# Altium PCB Tigershark 3D R1.3.PcbDoc (part 3 of 3)
Units mil, origin at the board's own origin, x right, y up, seen from the top; angles counter-clockwise.
Board outline 5500 x 4400 mil, 4 copper layers (Top Layer, Groun Plane, Power Plane, Bottom Layer); 258 components, 243 nets, 976 pads, 863 vias.
Unrouted connection lines stored in the file: 46.
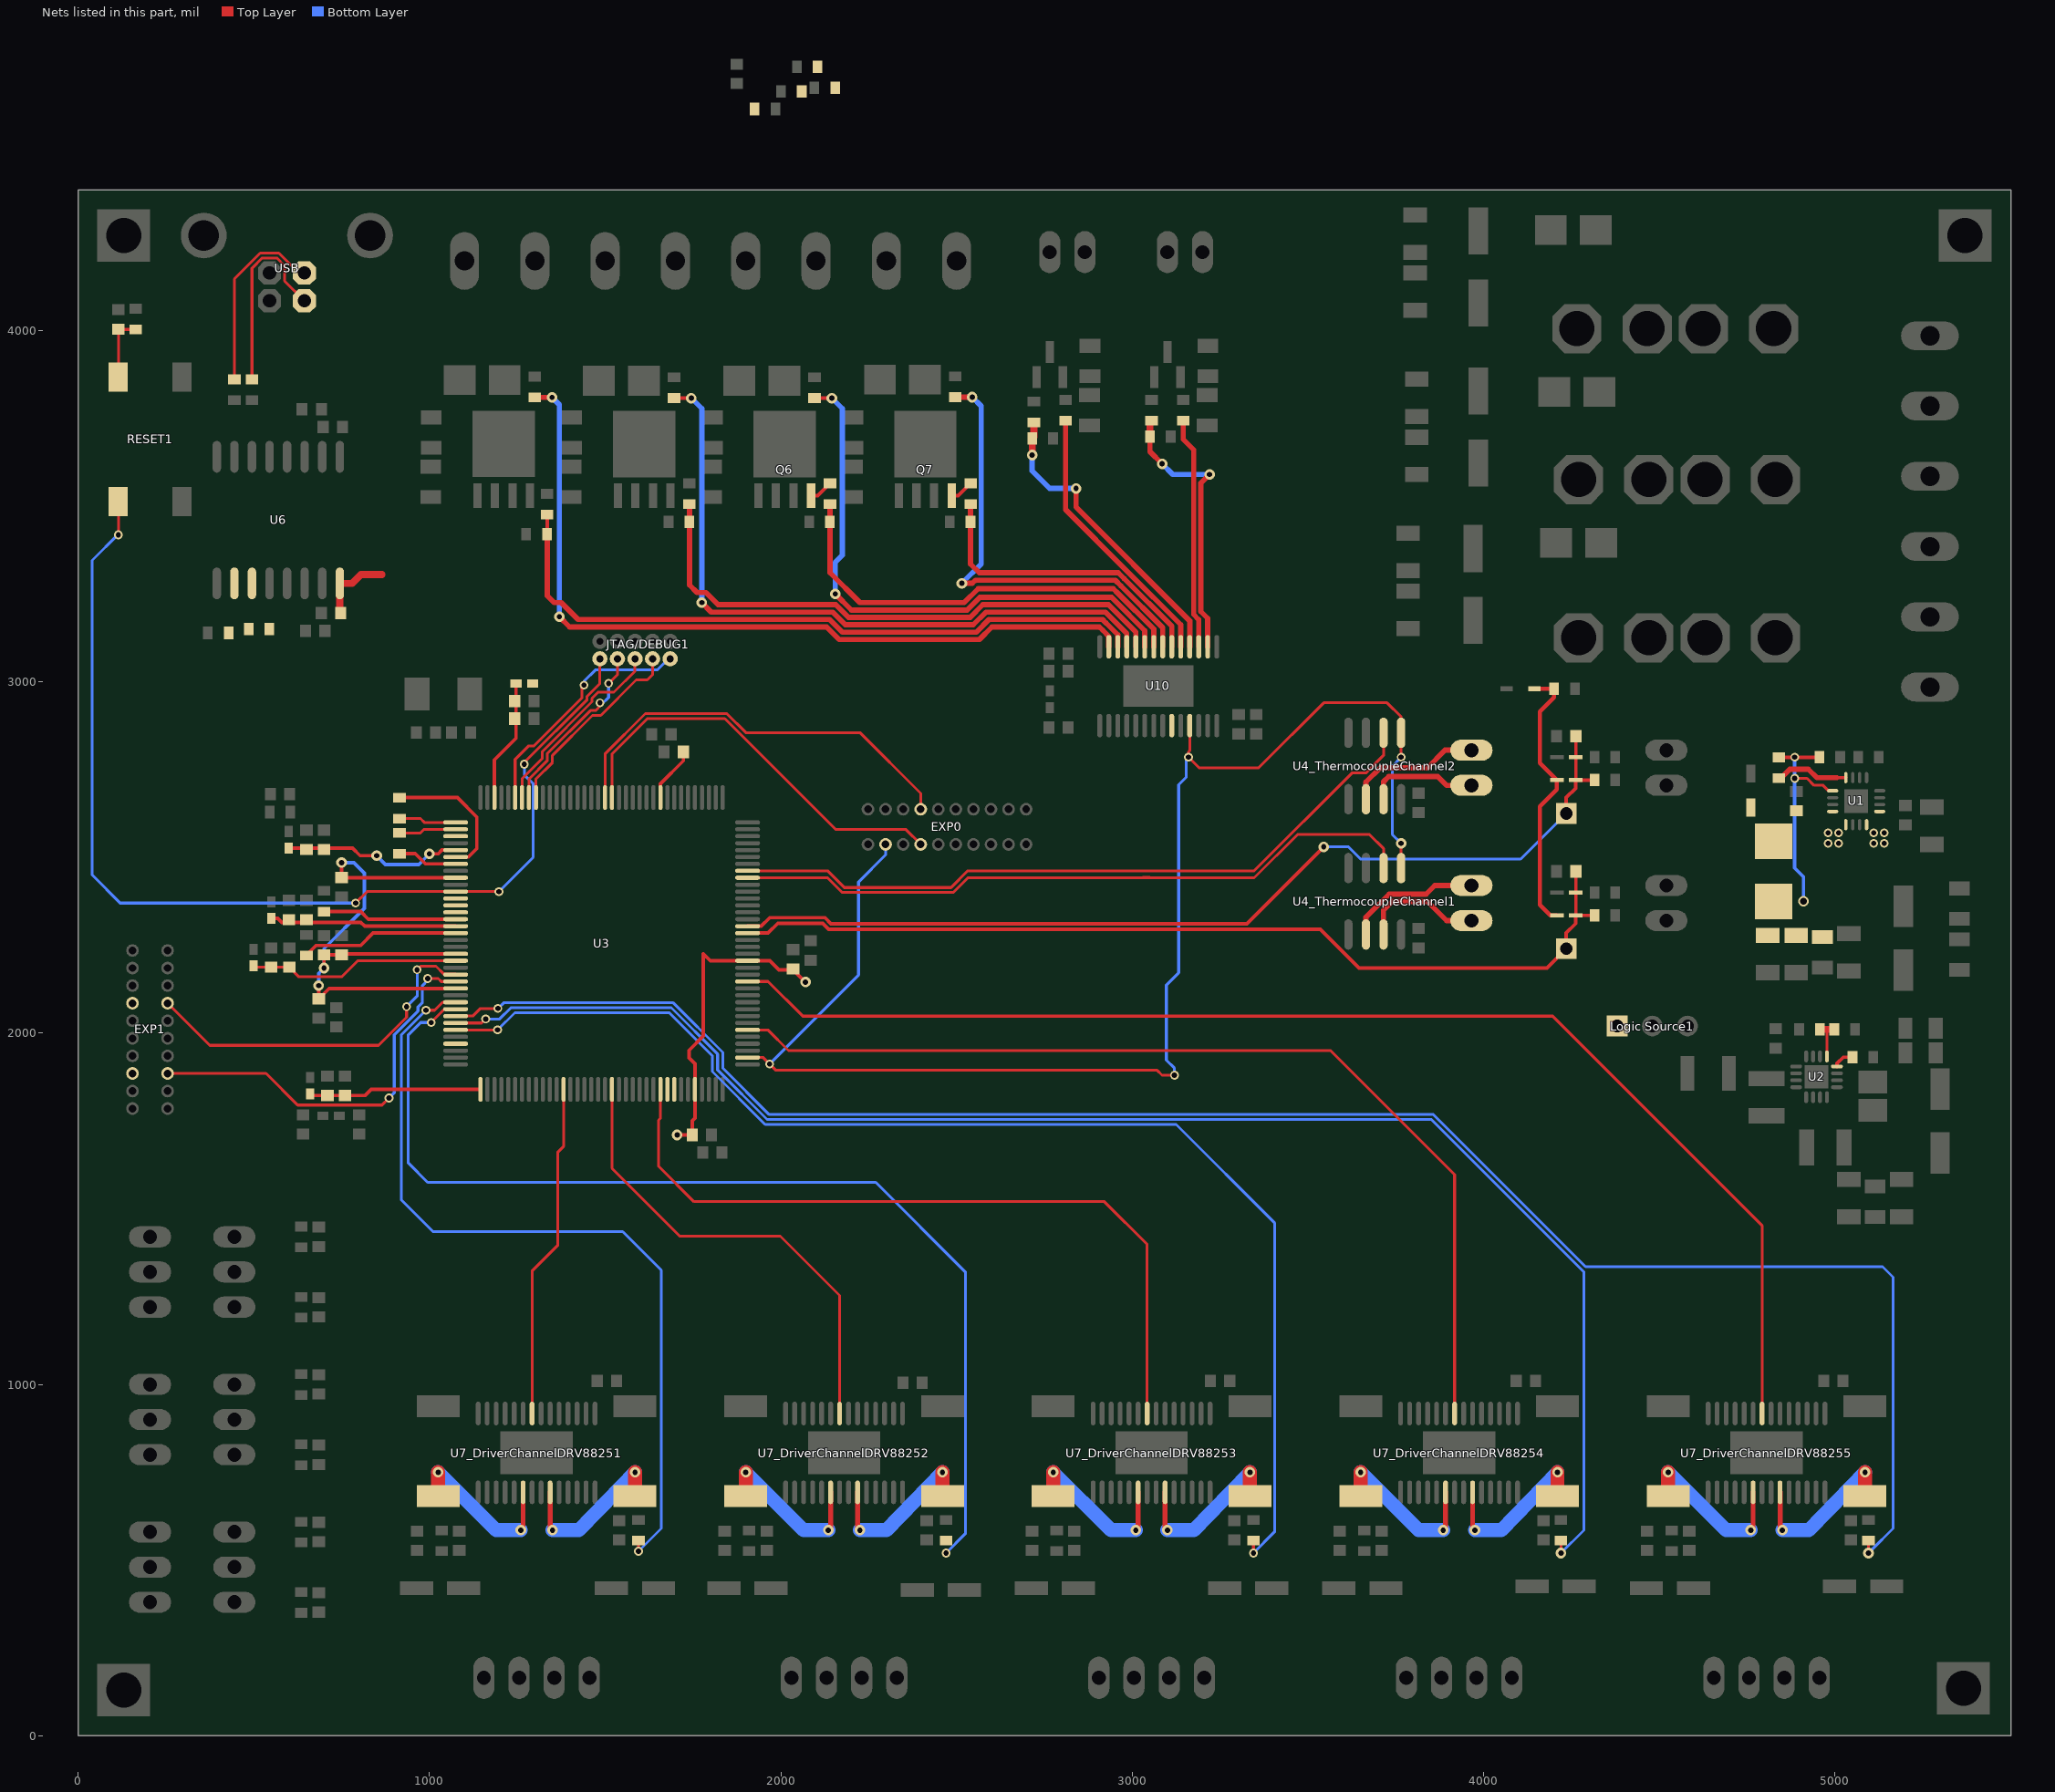
[diagram p5: the nets of this part, all layers, seen from the top]

## Via types
v1: diameter 25, hole 15, Top Layer to Bottom Layer, 408 vias
v2: diameter 30, hole 15, Top Layer to Bottom Layer, 347 vias
v3: diameter 19.68, hole 7.87, Top Layer to Bottom Layer, 90 vias
v4: diameter 50, hole 20, Top Layer to Bottom Layer, 15 vias
v5: diameter 30, hole 20, Top Layer to Bottom Layer, 3 vias

## Nets (pads, with @x,y where several pads share a name; then routed paths per layer and width w, separated by ;. In a path a pad name is that pad's centre, name@x,y a point inside that pad or via, vN(x,y) a via of type N, cw(c..) or ccw(c..) an arc to the next point about the centre after c; other vN are vias at no path point) (continued)
NetQ6_4: Q6.4 R66.2 | length 68.6
  Top Layer w10: Q6.4@2086,3529.28 2104.75,3529.28 R66.2@2140,3564.53
NetQ7_4: Q7.4 R70.2 | length 68.6
  Top Layer w10: Q7.4@2486,3529.28 2504.75,3529.28 R70.2@2540,3564.53
NetR4_1: R4.1 U3.51 | length 383.6
  Top Layer w10: R4.1@700,2345.47 804.53,2345.47 826.1,2323.9 U3.51@1074.65,2323.9
NetR5_2: R5.2 U3.42 | length 403.1
  Top Layer w10: R5.2@915,2670 1080,2670 1135,2615 1135,2525 1111.06,2501.06 U3.42@1074.65,2501.06
NetR6_1: R6.1 U3.53 | length 451.8
  Top Layer w10: R6.1@650,2220.47 650,2221.46 677.73,2249.19 804.19,2249.19 839.53,2284.53 U3.53@1074.65,2284.53
NetR12_1: R12.1 U2.4 | length 60.4
  Top Layer w10: U2.4@5005.25,1904.98 5005.25,1913.52 5023.18,1931.45 R12.1@5049.65,1931.45
NetR14_1: R14.1 U10.3 | length 661.9
  Top Layer w14: R14.1@3145,3743.05 3145,3690 3174.5,3660.5 3174.5,3191.51 3189.13,3176.87 U10.3@3189.13,3099.41
NetR15_1: R15.1 R16.1
NetR18_2: R18.2 USB.2 | length 553.5
  Top Layer w8: R18.2@495,3860.53 495,4176.64 524.36,4206 565.64,4206 588,4183.64 588,4140.21 USB.2@644.21,4084
NetR20_2: R20.2 USB.3 | length 539.2
  Top Layer w8: R20.2@445,3860.53 445,4146.44 518.56,4220 571.44,4220 628.44,4163 USB.3@644.21,4163
NetR22_2: R22.2 U3.43 | length 171.7
  Top Layer w10: R22.2@915,2510.47 959.53,2510.47 988.62,2481.38 U3.43@1074.65,2481.38
NetR32_DriverChannelDRV88251_2: R32_DriverChannelDRV88251.2 U7_DriverChannelDRV88251.9 | length 483.3
  Top Layer w14: U7_DriverChannelDRV88251.9@1343.39,692.8 1343.39,591.61 v2(1350,585)
  Top Layer w40: R32_DriverChannelDRV88251.2@1585,682.05 v2(1585,750)
  Bottom Layer w40: v2(1350,585) 1425,585 v2(1585,750)
NetR32_DriverChannelDRV88252_2: R32_DriverChannelDRV88252.2 U7_DriverChannelDRV88252.9 | length 483.3
  Top Layer w14: U7_DriverChannelDRV88252.9@2218.39,692.8 2218.39,591.61 v2(2225,585)
  Top Layer w40: R32_DriverChannelDRV88252.2@2460,682.05 v2(2460,750)
  Bottom Layer w40: v2(2225,585) 2300,585 v2(2460,750)
NetR32_DriverChannelDRV88253_2: R32_DriverChannelDRV88253.2 U7_DriverChannelDRV88253.9 | length 483.3
  Top Layer w14: U7_DriverChannelDRV88253.9@3093.39,692.8 3093.39,591.61 v2(3100,585)
  Top Layer w40: R32_DriverChannelDRV88253.2@3335,682.05 v2(3335,750)
  Bottom Layer w40: v2(3100,585) 3175,585 v2(3335,750)
NetR32_DriverChannelDRV88254_2: R32_DriverChannelDRV88254.2 U7_DriverChannelDRV88254.9 | length 483.3
  Top Layer w14: U7_DriverChannelDRV88254.9@3968.39,692.8 3968.39,591.61 v2(3975,585)
  Top Layer w40: R32_DriverChannelDRV88254.2@4210,682.05 v2(4210,750)
  Bottom Layer w40: v2(3975,585) 4050,585 v2(4210,750)
NetR32_DriverChannelDRV88255_2: R32_DriverChannelDRV88255.2 U7_DriverChannelDRV88255.9 | length 483.3
  Top Layer w14: U7_DriverChannelDRV88255.9@4843.39,692.8 4843.39,591.61 v2(4850,585)
  Top Layer w40: R32_DriverChannelDRV88255.2@5085,682.05 v2(5085,750)
  Bottom Layer w40: v2(4850,585) 4925,585 v2(5085,750)
NetR33_DriverChannelDRV88251_2: R33_DriverChannelDRV88251.2 U7_DriverChannelDRV88251.6 | length 481.8
  Top Layer w14: v2(1260,585) 1266.61,591.61 U7_DriverChannelDRV88251.6@1266.61,692.8
  Top Layer w40: R33_DriverChannelDRV88251.2@1025,682.05 v2(1025,750)
  Bottom Layer w40: v2(1025,750) 1190,585 v2(1260,585)
NetR33_DriverChannelDRV88252_2: R33_DriverChannelDRV88252.2 U7_DriverChannelDRV88252.6 | length 481.8
  Top Layer w14: v2(2135,585) 2141.61,591.61 U7_DriverChannelDRV88252.6@2141.61,692.8
  Top Layer w40: R33_DriverChannelDRV88252.2@1900,682.05 v2(1900,750)
  Bottom Layer w40: v2(1900,750) 2065,585 v2(2135,585)
NetR33_DriverChannelDRV88253_2: R33_DriverChannelDRV88253.2 U7_DriverChannelDRV88253.6 | length 481.8
  Top Layer w14: v2(3010,585) 3016.61,591.61 U7_DriverChannelDRV88253.6@3016.61,692.8
  Top Layer w40: R33_DriverChannelDRV88253.2@2775,682.05 v2(2775,750)
  Bottom Layer w40: v2(2775,750) 2940,585 v2(3010,585)
NetR33_DriverChannelDRV88254_2: R33_DriverChannelDRV88254.2 U7_DriverChannelDRV88254.6 | length 481.8
  Top Layer w14: v2(3885,585) 3891.61,591.61 U7_DriverChannelDRV88254.6@3891.61,692.8
  Top Layer w40: R33_DriverChannelDRV88254.2@3650,682.05 v2(3650,750)
  Bottom Layer w40: v2(3650,750) 3815,585 v2(3885,585)
NetR33_DriverChannelDRV88255_2: R33_DriverChannelDRV88255.2 U7_DriverChannelDRV88255.6 | length 481.8
  Top Layer w14: v2(4760,585) 4766.61,591.61 U7_DriverChannelDRV88255.6@4766.61,692.8
  Top Layer w40: R33_DriverChannelDRV88255.2@4525,682.05 v2(4525,750)
  Bottom Layer w40: v2(4525,750) 4690,585 v2(4760,585)
NetR37_1: R37.1 R38.2 U2.5 | length 117.4
  Top Layer w8: U2.5@4976.71,1933.52 4976.71,2009.98
  Top Layer w20: R38.2@4956.71,2010.45 R37.1@4997.65,2010.45
NetR45_1: R45.1 R46.1 U10.2 | length 795.8
  Top Layer w8: R45.1@3050.47,3738.52 R45.1@3055,3743.05
  Top Layer w15: R46.1@3050.47,3697.58 3050.47,3654.53 v2(3085,3620) ; U10.2@3214.72,3099.41 3214.72,3180.28 3195,3200 3195,3565 v2(3220,3590)
  Top Layer w20: R46.1@3050.47,3697.58 R45.1@3050.47,3738.52
  Bottom Layer w15: v2(3085,3620) 3115,3590 v2(3220,3590)
NetR48_1: R48.1 U10.5 | length 779.5
  Top Layer w15: R48.1@2810,3743.05 2810,3490 2985.63,3314.37 3137.95,3162.09 U10.5@3137.95,3099.41
NetR52_1: R52.1 R55.1 U10.4 | length 870.4
  Top Layer w8: R55.1@2715.47,3692.58 R55.1@2720,3697.1
  Top Layer w15: v2(2840,3550) 2840,3497.02 3163.54,3173.47 U10.4@3163.54,3099.41
  Top Layer w20: v2(2715,3645) 2715.47,3645.47 R55.1@2715.47,3692.58 ; R55.1@2720,3697.1 R52.1@2720,3738.05
  Bottom Layer w15: v2(2715,3645) 2715,3600 2765,3550 v2(2840,3550)
NetR57_1: R57.1 U10.13 | length 2327.8
  Top Layer w15: R57.1@1300,3809.11 v2(1349.11,3809.11) ; v2(1370,3185) 1399,3156 2130.21,3156 2166.21,3120 2565,3120 2601,3156 2906.41,3156 2916.04,3146.37 ; 2916.08,3146.37 2933.23,3129.23 U10.13@2933.23,3099.41
  Bottom Layer w15: v2(1349.11,3809.11) 1370,3788.22 v2(1370,3185)
NetR58_1: R58.1 R59.1 U10.12 | length 1964.5
  Top Layer w10: R59.1@1335,3420 R58.1@1335,3475.47
  Top Layer w15: R59.1@1335,3420 1335,3244.7 1354.7,3225 1375,3225 1423,3177 2138.9,3177 2174.9,3141 2556.3,3141 2592.3,3177 2915.11,3177 2924.74,3167.37 ; 2924.78,3167.37 2958.82,3133.34 U10.12@2958.82,3099.41
NetR61_1: R61.1 U10.11 | length 1957.1
  Top Layer w10: R61.1@1696,3807.11 v2(1745.11,3807.11)
  Top Layer w15: v2(1775,3225) 1802,3198 2147.6,3198 2183.6,3162 2547.6,3162 2583.6,3198 2923.81,3198 2933.44,3188.37 ; 2933.48,3188.37 2984.41,3137.44 U10.11@2984.41,3099.41
  Bottom Layer w15: v2(1745.11,3807.11) 1775,3777.22 v2(1775,3225)
NetR62_1: R62.1 R63.1 U10.10 | length 1627.7
  Top Layer w15: R62.1@1740,3505.47 1740,3275 1761.5,3253.5 1786.8,3253.5 1821.3,3219 2156.3,3219 2192.3,3183 2538.9,3183 2574.9,3219 2932.51,3219 2942.13,3209.37 ; 2942.18,3209.37 3010,3141.55 U10.10@3010,3099.41
NetR65_1: R65.1 U10.9 | length 1626.8
  Top Layer w10: R65.1@2096,3807.11 v2(2145.11,3807.11)
  Top Layer w15: v2(2155,3250) 2201,3204 2530.21,3204 2566.21,3240 2941.21,3240 2950.83,3230.37 ; 2950.88,3230.37 3035.59,3145.66 U10.9@3035.59,3099.41
  Bottom Layer w15: v2(2145.11,3807.11) 2175,3777.22 2175,3360 2155,3340 v2(2155,3250)
NetR66_1: R66.1 R67.1 U10.8 | length 1266.5
  Top Layer w15: R66.1@2140,3505.47 2140,3310 2225,3225 2521.51,3225 2561.51,3265 2945.9,3265 2959.53,3251.37 ; 2959.58,3251.37 3061.18,3149.77 U10.8@3061.18,3099.41
NetR69_1: R69.1 U10.7 | length 1297.7
  Top Layer w15: R69.1@2496,3809.75 v2(2544.75,3809.75) ; v2(2515,3280) 2545,3280 2554,3289 2951.6,3289 2968.23,3272.37 3086.77,3153.88 U10.7@3086.77,3099.41
  Bottom Layer w15: v2(2515,3280) 2570,3335 2570,3784.5 v2(2544.75,3809.75)
NetR70_1: R70.1 R71.1 U10.6 | length 874.7
  Top Layer w15: R70.1@2540,3505.47 2540,3335 2565,3310 2960.3,3310 2976.93,3293.37 3112.36,3157.98 U10.6@3112.36,3099.41
NetT2_ThermocoupleChannel1_1: T2_ThermocoupleChannel1.1 U4_ThermocoupleChannel1.3 | length 351.9
  Top Layer w15: U4_ThermocoupleChannel1.3@3715,2280.51 3715,2349.49 3740,2374.49 3840,2374.49 3894.49,2320 T2_ThermocoupleChannel1.1@3965,2320
NetT2_ThermocoupleChannel1_2: T2_ThermocoupleChannel1.2 U4_ThermocoupleChannel1.2 | length 386.5
  Top Layer w15: U4_ThermocoupleChannel1.2@3665,2280.51 3665,2329.49 3731,2395.49 3836,2395.49 3860.51,2420 T2_ThermocoupleChannel1.2@3965,2420
NetT2_ThermocoupleChannel2_1: T2_ThermocoupleChannel2.1 U4_ThermocoupleChannel2.3 | length 316.1
  Top Layer w15: U4_ThermocoupleChannel2.3@3715,2665.51 3715,2715 3730,2730 3869.49,2730 3894.49,2705 T2_ThermocoupleChannel2.1@3965,2705
NetT2_ThermocoupleChannel2_2: T2_ThermocoupleChannel2.2 U4_ThermocoupleChannel2.2 | length 386.5
  Top Layer w15: U4_ThermocoupleChannel2.2@3665,2665.51 3665,2714.49 3705.51,2755 3840,2755 3890,2805 T2_ThermocoupleChannel2.2@3965,2805
NetU10_23: U10.23
NRST: U3.69
OVREF: D1.2 D11_ThermistorChannel1.2 D11_ThermistorChannel2.2 R1.1 | length 788.8
  Top Layer w12: D1.2@4144.37,2980 R1.1@4200.47,2980 4200.47,2955.47 4160,2915 4160,2768.43 D11_ThermistorChannel2.2@4208.43,2720 4208.43,2693.43 4160,2645 4160,2365 4190,2335 D11_ThermistorChannel1.2@4208.43,2335
PG: R9.2 U1.8 | length 214
  Top Layer w10: 5005,2726.93 U1.8@5030.47,2726.93
  Top Layer w15: R9.2@4836.46,2726.93 4846.93,2726.93 4871,2751 4924,2751 4948.07,2726.93 5005,2726.93
REF1: R31_DriverChannelDRV88251.2 U3.63 | length 2343.3
  Top Layer w8: v1(990,2065) 1015,2065 1037.68,2087.68 U3.63@1074.65,2087.68 ; v1(1595,525) R31_DriverChannelDRV88251.2@1595,555.47
  Bottom Layer w8: v1(990,2065) 920,1995 920,1525 1010,1435 1550,1435 1660,1325 1660,590 v1(1595,525)
REF2: R31_DriverChannelDRV88252.2 U3.64 | length 3066.5
  Top Layer w8: v1(1005,2030) 1005,2030.68 1042.31,2067.99 U3.64@1074.65,2067.99
  Bottom Layer w8: v1(1005,2030) 975,2030 940,1995 940,1630 995,1575 2270,1575 2525,1320 2525,575 v1(2470,520)
REF3: R31_DriverChannelDRV88253.2 U3.67 | length 3625.2
  Top Layer w8: U3.67@1074.65,2008.94 v1(1193.94,2008.94) ; v1(3345,520) R31_DriverChannelDRV88253.2@3345,555.47
  Bottom Layer w8: v1(1193.94,2008.94) 1243,2058 1682.4,2058 1805,1935.4 1805,1890.2 1955.2,1740 3125,1740 3405,1460 3405,580 v1(3345,520)
REF4: R31_DriverChannelDRV88254.2 U3.66 | length 4428.7
  Top Layer w8: U3.66@1074.65,2028.62 1148.62,2028.62 v1(1160,2040) ; v2(4220,520) R31_DriverChannelDRV88254.2@4220,555.47
  Bottom Layer w8: v1(1160,2040) 1200,2040 1232,2072 1688.2,2072 1820,1940.2 1820,1895 1961,1754 3851,1754 4285,1320 4285,585 v2(4220,520)
REF5: R31_DriverChannelDRV88255.2 U3.65 | length 5291.2
  Top Layer w8: U3.65@1074.65,2048.31 1123.31,2048.31 1145,2070 v1(1195,2070) ; v2(5095,520) R31_DriverChannelDRV88255.2@5095,555.47
  Bottom Layer w8: v1(1195,2070) 1211,2086 1694,2086 1835,1945 1835,1900 1967,1768 3857,1768 4290,1335 5135,1335 5165,1305 5165,590 v2@5105,530
REF_EXP1: EXP1.8 U3.100
REF_EXP2: EXP1.13 U3.60 U3.101 | length 1144.2
  Top Layer w8: EXP1.13@255,1885 535,1885 625,1795 865,1795 v1(885,1815) ; v1(995,2155) 1025,2155 1033.27,2146.73 U3.60@1074.65,2146.73
  Bottom Layer w8: v1(885,1815) 900,1830 900,1995 967.5,2062.5 967.5,2074.32 980,2086.82 980,2135 995,2150 v1(995,2155)
RESET: C63.2 JTAG/DEBUG1.10 R21.1 RESET1.1 U3.47 | length 3284.4
  Top Layer w8: RESET1.1@114.45,3512.83 115,3512.28 v1(115,3418) ; RESET1.1@115.97,3867.17 115.97,4002.47 R21.1@164,4002.47 ; v1(790,2370) 822.64,2402.64 U3.47@1074.65,2402.64 v1(1197.64,2402.64) ; v1@1267.5,2767.5 1448.5,2948.5 1448.5,2958.3 1485,2994.8 JTAG/DEBUG1.10@1485,3065
  Bottom Layer w8: v1@115,3420 40,3345 40,2450 120,2370 v1(790,2370) ; v1(1197.64,2402.64) 1295,2500 1295,2710 1270,2735 v1(1270,2765)
RXD1: EXP0.17 U3.18 | length 1208.8
  Top Layer w8: U3.18@1499.84,2670.35 1499.84,2794.64 1614.2,2909 1846.2,2909 1900.2,2855 2225,2855 2398,2682 EXP0.17@2398,2637
SCLK: EXP0.2 U3.110 U4_ThermocoupleChannel1.5 U4_ThermocoupleChannel2.5 U10.25 | length 4191
  Top Layer w8: U3.110@1905.35,1930.2 1949.8,1930.2 v1(1967.9,1912.1) 1986,1894 3070.8,1894 3084.8,1880 v1(3120,1880) ; U10.25@3163.54,2875 3163.54,2803.54 3160,2800 v1(3160,2785) 3190,2755 3360,2755 3545,2940 3725,2940 3765,2900 U4_ThermocoupleChannel2.5@3765,2854.49 v1(3765,2785) ; U4_ThermocoupleChannel1.5@3765,2469.49 v2(3765,2540)
  Bottom Layer w8: v1(1967.9,1912.1) 2221,2165.2 2221,2429.8 2298,2506.8 EXP0.2@2298,2537 ; v1(3120,1880) 3120,1900 3097,1923 3097,2136.6 3132,2171.6 3132,2706.6 3153.5,2728.1 3153.5,2778.5 v1(3160,2785) ; v2(3765,2540) 3740,2565 3740,2760 v1(3765,2785)
SHDN: U3.50
STEP1: U3.85 U7_DriverChannelDRV88251.22 | length 959.5
  Top Layer w8: U7_DriverChannelDRV88251.22@1292.2,917.2 1292.2,1322.81 1364.68,1395.28 1364.68,1660.28 1381.73,1677.34 U3.85@1381.73,1839.65
STEP2: U3.92 U7_DriverChannelDRV88252.22 | length 1358.4
  Top Layer w8: U3.92@1519.53,1839.65 1519.53,1614.87 1712.4,1422 1998.6,1422 2167.2,1253.4 U7_DriverChannelDRV88252.22@2167.2,917.2
STEP3: U3.99 U7_DriverChannelDRV88253.22 | length 2184.5
  Top Layer w8: U3.99@1657.32,1839.65 1657.32,1757.12 1652,1751.8 1652,1620.99 1752.99,1520 2920.6,1520 3042.2,1398.4 U7_DriverChannelDRV88253.22@3042.2,917.2
STEP4: U3.114 U7_DriverChannelDRV88254.22 | length 2862.4
  Top Layer w8: U3.114@1905.35,2008.94 1962.87,2008.94 2021.81,1950 3564.4,1950 3917.2,1597.19 U7_DriverChannelDRV88254.22@3917.2,917.2
STEP5: U3.121 U7_DriverChannelDRV88255.22 | length 3709.5
  Top Layer w8: U3.121@1905.35,2146.73 1963.67,2146.73 2062.4,2048 4196.4,2048 4792.2,1452.19 U7_DriverChannelDRV88255.22@4792.2,917.2
STEP_EXP1: EXP1.4
STEP_EXP2: EXP1.17 U3.59 | length 1033.8
  Top Layer w8: EXP1.17@255,2085 375,1965 855,1965 935,2045 v1(935,2075) ; v1(965,2180) 975,2190 1018.73,2190 1040.12,2168.6 1072.46,2168.6 U3.59@1074.65,2166.42
  Bottom Layer w8: v1(935,2075) 965,2105 v1(965,2180)
SW: C7.1 D5.2 L1.1 U1.1 U1.12 U1.13 U1.16
  other v1: 4980,2540 5010,2540 5110,2540 5140,2540 4980,2570 5010,2570 5110,2570 5140,2570
SW_OUT: C8.2 C29.1 FB2.1 L1.2 R7.2 R9.1 U1.9 | length 668.1
  Top Layer w8: v1(4885,2725) 4920,2725 4940,2705 4966.21,2705 4981.69,2689.53 U1.9@4993.07,2689.53
  Top Layer w10: R9.1@4835.47,2785 v1(4885,2785) R7.2@4960.47,2785
  Bottom Layer w10: v1(4885,2785) 4885,2470 4910,2445 v5(4910,2375)
TC_CS1: U3.136 U4_ThermocoupleChannel1.6 | length 1968.1
  Top Layer w8: U3.136@1905.35,2442.01 2132.79,2442.01 2174.8,2400 2490.2,2400 2532.2,2442.01 3030.19,2442.01 3030.68,2442.5 3049.32,2442.5 3049.81,2442.01 3347.01,2442.01 3470,2565 3675.36,2565 3715,2525.36 U4_ThermocoupleChannel1.6@3715,2469.49
TC_CS2: U3.137 U4_ThermocoupleChannel2.6 | length 2079.1
  Top Layer w8: U3.137@1905.35,2461.69 2132.9,2461.69 2180.6,2414 2484.4,2414 2532.09,2461.69 3346.69,2461.69 3625,2740 3665,2740 3715,2790 U4_ThermocoupleChannel2.6@3715,2854.49 U4_ThermocoupleChannel2.6@3715,2825
TCK/SWDCLK: JTAG/DEBUG1.4 R25.1 U3.28 | length 564.4
  Top Layer w8: U3.28@1302.99,2670.35 1302.99,2722.99 1350,2770 1350,2790 1464,2904 1487.48,2904 1588.48,3005 1620,3005 1635,3020 JTAG/DEBUG1.4@1635,3065
TDI: JTAG/DEBUG1.8 R27.1 U3.29 | length 521.7
  Top Layer w8: U3.29@1283.31,2670.35 1283.31,2723.11 1335,2774.8 1335,2794.8 1458.2,2918 1473,2918 1490,2935 v1(1485,2940) ; v1(1510,2995) 1535,3020 JTAG/DEBUG1.8@1535,3065
  Bottom Layer w8: v1(1485,2940) 1490,2935 1510,2955 v1(1510,2995)
TDO/SWO: JTAG/DEBUG1.6 R26.1 U3.30 | length 554.1
  Top Layer w8: U3.30@1263.62,2670.35 1263.62,2723.62 1321,2781 1321,2801.2 1462.5,2942.7 1462.5,2952.5 1480,2970 1525,2970 1585,3030 JTAG/DEBUG1.6@1585,3065
THERM_AN1: C30_ThermistorChannel1.2 D11_ThermistorChannel1.1 D12_ThermistorChannel1.2 R14_ThermistorChannel1.1 THM_TP1_ThermistorChannel1.1 U3.128 | length 2700.7
  Top Layer w10: U3.128@1905.35,2284.53 1963.31,2284.53 1991.24,2312.45 2118.93,2312.45 2136.38,2295 3535,2295 3645,2185 4180,2185 THM_TP1_ThermistorChannel1.1@4235,2240 4235,2285 4261.57,2311.57 D11_ThermistorChannel1.1@4261.57,2335 R14_ThermistorChannel1.1@4315.47,2335 ; D11_ThermistorChannel1.1@4262.56,2335.98 C30_ThermistorChannel1.2@4262.56,2460
THERM_AN2: C30_ThermistorChannel2.2 D11_ThermistorChannel2.1 D12_ThermistorChannel2.2 R14_ThermistorChannel2.1 THM_TP1_ThermistorChannel2.1 U3.129 | length 2789.9
  Top Layer w10: U3.129@1905.35,2304.21 1944.21,2304.21 1968.45,2328.45 2125.56,2328.45 2143.01,2311 3326,2311 v2(3545,2530) ; THM_TP1_ThermistorChannel2.1@4235,2625 4235,2670 4261.57,2696.57 D11_ThermistorChannel2.1@4261.57,2720 R14_ThermistorChannel2.1@4315.47,2720 ; D11_ThermistorChannel2.1@4262.56,2720.98 C30_ThermistorChannel2.2@4262.56,2845
  Bottom Layer w8: v2(3545,2530) 3615,2530 3650,2495 4105,2495 THM_TP1_ThermistorChannel2.1@4235,2625
TMS/SWDIO: JTAG/DEBUG1.2 R24.1 U3.31 | length 692.4
  Top Layer w8: U3.31@1243.94,2670.35 1243.94,2778.94 1282.5,2817.5 1297.5,2817.5 1434.5,2954.5 1434.5,2984.5 v1(1440,2990)
  Bottom Layer w8: v1(1440,2990) 1440,3001.46 1471.89,3033.35 1648.11,3033.35 1679.76,3065 JTAG/DEBUG1.2@1685,3065
TXD1: EXP0.4 U3.17 | length 1192.6
  Top Layer w8: U3.17@1519.53,2670.35 1519.53,2794.53 1620,2895 1840.4,2895 2155.4,2580 2355,2580 EXP0.4@2398,2537
UDM_N: R22.1 U3.38 U6.11 | length 163.9
  Top Layer w8: R22.1@915,2569.53 974.53,2569.53 984.8,2579.8 U3.38@1074.65,2579.8
UDP_P: R5.1 U3.37 U6.10 | length 164.2
  Top Layer w8: R5.1@915,2610.47 974.53,2610.47 985.51,2599.49 U3.37@1074.65,2599.49
VBUS: "Logic Source1.1" C57.2 R16.2 U3.39 U6.16 | length 212.7
  Top Layer w20: C57.2@745,3197.56 U6.16@745,3279.88 779.88,3279.88 805,3305 865,3305
VDDANA: C13.2 C27.2 FB6.2 U3.73 | length 494.3
  Top Layer w10: FB6.2@663.94,1822.44 C27.2@710,1822.44 C13.2@760,1822.44 817.44,1822.44 834.65,1839.65 U3.73@1145.51,1839.65
  Top Layer w15: FB6.2@660,1826.38 FB6.2@663.94,1822.44
VDDBU: C28.2 C53.2 FB7.2 U3.52 | length 533.8
  Top Layer w10: FB7.2@550,2326.38 568.62,2326.38 580,2315 805,2315 815.79,2304.21 U3.52@1074.65,2304.21
VDDIN: C54.2 C55.2 FB5.2 U3.57 | length 617.1
  Top Layer w8: FB5.2@501.22,2201.38 FB5.2@505.16,2197.44 ; FB5.2@503.94,2187.44 C55.2@550,2187.44 C54.2@601.22,2187.44 628.66,2160 750,2160 795.79,2205.79 U3.57@1074.65,2205.79 ; C54.2@601.22,2197.44 C54.2@608.66,2190
VDDOUT: C36.2 C37.2 C38.2 C39.2 C40.2 C41.2 C42.2 FB4.1 U3.10 U3.45 U3.56 U3.61 U3.104 U3.124 | length 2738.2
  Top Layer w10: v2(685,2135) C42.2@685,2097.56 714.49,2127.05 U3.61@1074.65,2127.05 ; v2(700,2185) C37.2@700,2222.44 C36.2@750,2222.44 753.03,2225.47 U3.56@1074.65,2225.47 ; v2(750,2485) C41.2@750,2442.56 750.55,2442.01 U3.45@1074.65,2442.01 ; U3.10@1657.32,2670.35 1657.32,2709.7 1722.56,2774.93 C38.2@1722.56,2800 ; v2(1705,1710) C40.2@1747.87,1710 1747.87,1749.8 1755.75,1757.68 U3.104@1755.75,1839.65 1755.75,1912.44 1738.96,1929.23 1738.96,1950.77 1779.53,1991.34 1779.53,2225.47 1799.21,2205.79 U3.124@1905.35,2205.79 1969.21,2205.79 ; 1970.16,2204.84 1995,2180 C39.2@2035,2180 ; C39.2@2035,2182.44 C39.2@2035,2180 ; v2(2070,2145) C39.2@2035,2180
  Bottom Layer w10: v2(685,2135) 685,2170 v2(700,2185) 700,2240 815,2355 815,2455 785,2485 v2(750,2485)
VDDPLL: C32.2 C33.2 FB4.2 U3.34 | length 350.1
  Top Layer w10: U3.34@1184.88,2670.35 1184.88,2777.51 1246.38,2839.01 FB4.2@1246.38,2995
VDDUTMI: C60.2 C61.2 FB8.2 U3.41 | length 520.7
  Top Layer w10: FB8.2@600,2526.38 781.25,2526.38 802.63,2505 v2(850,2505) ; v2(1000,2510) 1025,2510 1035.75,2520.75 U3.41@1074.65,2520.75
  Bottom Layer w10: v2@850,2515 v2(850,2505) 875,2480 970,2480 v2(1000,2510)
XIN32: U3.48
XOUT32: U3.49
pads on no net: JTAG/DEBUG1.1@1760.59,3146.5 JTAG/DEBUG1.7 U1.6 U1.7 U3.1 U3.2 U3.3 U3.4 U3.5 U3.6 U3.7 U3.8 U3.13 U3.14 U3.15 U3.16 U3.23 U3.24 U3.25 U3.26 U3.27 U3.32 U3.130 U3.143 U3.144 U4_ThermocoupleChannel1.8 U4_ThermocoupleChannel2.8 U6.13 U7_DriverChannelDRV88251.18 U7_DriverChannelDRV88251.19 U7_DriverChannelDRV88251.23 U7_DriverChannelDRV88251.27 U7_DriverChannelDRV88252.18 U7_DriverChannelDRV88252.19 U7_DriverChannelDRV88252.23 U7_DriverChannelDRV88252.27 U7_DriverChannelDRV88253.18 U7_DriverChannelDRV88253.19 U7_DriverChannelDRV88253.23 U7_DriverChannelDRV88253.27 U7_DriverChannelDRV88254.18 U7_DriverChannelDRV88254.19 U7_DriverChannelDRV88254.23 U7_DriverChannelDRV88254.27 U7_DriverChannelDRV88255.18 U7_DriverChannelDRV88255.19 U7_DriverChannelDRV88255.23 U7_DriverChannelDRV88255.27 USB.P$1 USB.P$2
copper on no net: | length 622.1
  Top Layer w15: 595,3279.88 595,3370 630,3405 865,3405
  Bottom Layer w8: 2365,880 2400,845 ; 3240,880 3275,845 ; 4115,880 4150,845 ; 4990,880 5025,845 4990,880

## Polygon pours and split planes (outlines as drawn)
GND on Top Layer "Top Layer-No Net" (solid, remove dead copper, pour order 120): 3745,3175 3745,3010 4085,3010 4085,3175 4000,3175 4000,3235 3995,3240 3940,3240 3940,3175
GND on Top Layer "Top Layer-No Net" (solid, remove dead copper, pour order 118): 3745,3615 3745,3400 3825,3400 3825,3470 4010,3470 4010,3690 3960,3690 3960,3615
GND on Top Layer "Top Layer-No Net" (solid, remove dead copper, pour order 116): 3770,4085 3770,3835 3850,3835 3850,3910 4010,3910 4010,4145 3960,4145 3960,4085
+12VCC3 on Top Layer "Top Layer-No Net" (solid, remove dead copper, pour order 87): 4545,3475 4545,3675 4255,3675 4255,3900 3855,3900 3855,3830 3760,3830 3760,3995 3480,3995 3480,3620 3950,3620 3950,3700 4020,3700 4020,3475
SW_OUT on Top Layer "Top Layer-No Net" (solid, remove dead copper, pour order 51): 4769,2250 4769,2430 4930,2430 4930,2305 4994,2305 4994,2250
NetF3_1 on Top Layer "Top Layer-No Net" (solid, remove dead copper, pour order 88): 5435,3080 5435,3245 4550,3245 4550,3025 5120,3025 5120,3080
+12VCC2 on Top Layer "Top Layer-No Net" (solid, remove dead copper, pour order 108): 3230,3070 3375,3070 3375,4375 3260,4375 3260,3225 3230,3195
GND on Top Layer "Top Layer-No Net" (solid, remove dead copper, pour order 113): 2795,3100 2795,2845 2840,2845 2840,2915 3275,2915 3280,2910 3280,2890 3380,2890 3375,2895 3375,3060 2850,3060 2850,3100
+12VCC2 on Top Layer "Top Layer-No Net" (solid, remove dead copper, pour order 110): 2910,3935 2910,4300 2825,4300 2825,3985 2850,3985 2850,3935
+12VCC2 on Top Layer "Top Layer-No Net" (solid, remove dead copper, pour order 110): 3245,3935 3245,4300 3160,4300 3160,3985 3185,3985 3185,3935
NetD10_1 on Top Layer "Top Layer-No Net" (solid, remove dead copper, pour order 105): 3080,3935 3120,3935 3120,4130 3150,4160 3150,4300 3050,4300 3050,4160 3080,4130
NetD11_1 on Top Layer "Top Layer-No Net" (solid, remove dead copper, pour order 105): 2745,3935 2785,3935 2785,4130 2815,4160 2815,4300 2715,4300 2715,4160 2745,4130
GND on Top Layer "Top Layer-No Net" (solid, remove dead copper, pour order 90): 2314.5,3569.61 2314.5,3484.61 2169.5,3484.61 2169.5,3299.61 2499.5,3299.61 2504.5,3304.61 2504.5,3484.61 2454.5,3484.61 2454.5,3569.61
GND on Top Layer "Top Layer-No Net" (solid, remove dead copper, pour order 91): 1914.5,3569.61 1914.5,3484.61 1769.5,3484.61 1769.5,3299.61 2099.5,3299.61 2104.5,3304.61 2104.5,3484.61 2054.5,3484.61 2054.5,3569.61
GND on Top Layer "Top Layer-No Net" (solid, remove dead copper, pour order 92): 1514.5,3569.61 1514.5,3484.61 1369.5,3484.61 1369.5,3299.61 1699.5,3299.61 1704.5,3304.61 1704.5,3484.61 1654.5,3484.61 1654.5,3569.61
GND on Top Layer "Top Layer-No Net" (solid, remove dead copper, pour order 68): 4375,1300 4680,1300 4680,1025 4595,1025 4595,950 4645,950 4645,875 5000,875 5000,950 5020,950 5020,1055 4860,1055 4860,1305 5240,1305 5240,30 5000,30 5000,380 5120,380 5120,455 5015,455 5015,575 5065,575 5065,530 5120,530 5120,635 5155,635 5155,735 5010,735 5010,660 4965,660 4965,735 4440,735 4440,485 4495,485 4495,385 4615,385 4615,30 4385,30
GND on Top Layer "Top Layer-No Net" (solid, remove dead copper, pour order 69): 3500,1300 3805,1300 3805,1025 3720,1025 3720,950 3770,950 3770,875 4125,875 4125,950 4145,950 4145,1055 3985,1055 3985,1305 4365,1305 4365,30 4125,30 4125,380 4245,380 4245,455 4140,455 4140,575 4190,575 4190,530 4245,530 4245,635 4280,635 4280,735 4135,735 4135,660 4090,660 4090,735 3565,735 3565,485 3620,485 3620,385 3740,385 3740,30 3510,30
GND on Top Layer "Top Layer-No Net" (solid, remove dead copper, pour order 70): 2625,1300 2930,1300 2930,1025 2845,1025 2845,950 2895,950 2895,875 3250,875 3250,950 3270,950 3270,1055 3110,1055 3110,1305 3490,1305 3490,30 3250,30 3250,380 3370,380 3370,455 3265,455 3265,575 3315,575 3315,530 3370,530 3370,635 3405,635 3405,735 3260,735 3260,660 3215,660 3215,735 2690,735 2690,485 2745,485 2745,385 2865,385 2865,30 2635,30
GND on Top Layer "Top Layer-No Net" (solid, remove dead copper, pour order 71): 1750,1300 2055,1300 2055,1025 1970,1025 1970,950 2020,950 2020,875 2375,875 2375,950 2395,950 2395,1055 2235,1055 2235,1305 2615,1305 2615,30 2375,30 2375,380 2495,380 2495,455 2390,455 2390,575 2440,575 2440,530 2495,530 2495,635 2530,635 2530,735 2385,735 2385,660 2340,660 2340,735 1815,735 1815,485 1870,485 1870,385 1990,385 1990,30 1760,30
GND on Top Layer "Top Layer-No Net" (solid, remove dead copper, pour order 77): 4749.18,2028.45 4749.18,1901.45 4804.18,1901.45 4804.18,1987.45 4911.18,1987.45 4911.18,1907.45 4965.18,1907.45 4965.18,1956.45 4936.18,1956.45 4936.18,2028.45
GND on Top Layer "Top Layer-No Net" (solid, remove dead copper, pour order 75): 4951.18,1845.45 4981.18,1845.45 4981.18,1614.45 4747.18,1614.45 4747.18,1790.45 4863.18,1790.45 4863.18,1749.45 4951.18,1749.45
NetC24_2 on Top Layer "Top Layer-No Net" (solid, remove dead copper, pour order 76): 4902.18,1910.45 4902.18,1900.45 4877.18,1900.45 4812.18,1900.45 4812.18,1975.45 4852.18,1975.45 4852.18,1910.45
NetL2_1 on Top Layer "Top Layer-No Net" (solid, remove dead copper, pour order 74): 4989.18,1893.45 4989.18,1837.45 5147.18,1837.45 5147.18,1893.45
SW on Top Layer "Mechanical 15-No Net" (solid, pour order 62): 5035,2635 5035,2575 5025,2575 5025,2520 4880,2520 4880,2490 4770,2490 4770,2610 4740,2610 4740,2675 4780,2675 4780,2645 4910,2645 4910,2625 4970,2625 4970,2635
+12VCC1 on Top Layer "Mechanical 15-No Net" (solid, remove dead copper, pour order 61): 5015,2640 5015,2660 4980,2660 4980,2670 4915,2670 4915,2630 4980,2630 4980,2640
GND on Top Layer "Mechanical 15-No Net" (solid, pour order 67): 5075,2620 5045,2620 5045,2480 5320,2480 5320,2575 5230,2575 5230,2610 5165,2610 5165,2515 5075,2515
SW on Top Layer "Mechanical 15-No Net" (solid, pour order 66): 5160,2635 5095,2635 5095,2620 5085,2620 5085,2520 5160,2520
+12VCC1 on Top Layer "Mechanical 15-No Net" (solid, pour order 60): 5105,2645 5105,2675 5165,2675 5165,2785 5315,2785 5315,2620 5230,2620 5230,2630 5165,2630 5165,2645
NetC22_1 on Top Layer "Top Layer-No Net" (solid, remove dead copper, pour order 73): 4721.45,1892.45 4905.18,1893.45 4905.18,1838.45 4923.18,1838.45 4923.18,1799.45 4872.18,1799.45 4872.18,1848.45 4721.45,1847.45 4721.45,1827.45 4676.45,1827.45 4676.45,1937.45 4721.45,1937.45
3.3VCC on Top Layer "Top Layer-No Net" (solid, remove dead copper, pour order 54): 5084,1535 5234,1535 5234,1450 5334,1450 5334,1725 5219,1725 5219,1975 5164,1975 5164,1610 5084,1610
+5VCC on Top Layer "Top Layer-No Net" (solid, remove dead copper, pour order 52): 5384,2235 5384,2055 5214,2055 5214,2115 4934,2115 4934,2235
+12VCC3 on Top Layer "Top Layer-No Net" (solid, remove dead copper, pour order 50): 1160,4378.64 975,4378.64 975,3733.64 1115,3733.64 1115,3808.64 1160,3808.64 1160,4378.64
+12VCC2 on Top Layer "Top Layer-No Net" (solid, remove dead copper, pour order 63): 1560,4378.64 1375,4378.64 1375,3733.64 1515,3733.64 1515,3808.64 1560,3808.64 1560,4378.64
+12VCC2 on Top Layer "Top Layer-No Net" (solid, remove dead copper, pour order 64): 1960,4378.64 1775,4378.64 1775,3733.64 1915,3733.64 1915,3808.64 1960,3808.64 1960,4378.64
+12VCC2 on Top Layer "Top Layer-No Net" (solid, remove dead copper, pour order 65): 2360,4378.64 2175,4378.64 2175,3733.64 2315,3733.64 2315,3808.64 2360,3808.64 2360,4378.64
NetC4_1 on Top Layer "Top Layer-No Net" (solid, remove dead copper, pour order 78): 5153.18,1816.45 5061.18,1816.45 5061.18,1786.45 5000.18,1786.45 5000.18,1614.45 4999,1505 5079,1505 5079,1450 5149,1450 5149,1535 5074,1535 5074,1615 5153.18,1614.45
NetD12_1 on Top Layer "Top Layer-No Net" (solid, remove dead copper, pour order 59): 1350,4378.64 1350,3843.64 1270,3843.64 1270,3778.64 1305,3778.64 1305,3578.64 1105,3578.64 1105,3493.64 970,3493.64 970,3578.64 1040,3578.64 1040,3718.64 1120,3718.64 1120,3798.64 1165,3798.64 1165,4378.64
NetD14_1 on Top Layer "Top Layer-No Net" (solid, remove dead copper, pour order 58): 1750,4378.64 1750,3843.64 1670,3843.64 1670,3778.64 1705,3778.64 1705,3578.64 1505,3578.64 1505,3493.64 1370,3493.64 1370,3578.64 1440,3578.64 1440,3718.64 1520,3718.64 1520,3798.64 1565,3798.64 1565,4378.64
NetD16_1 on Top Layer "Top Layer-No Net" (solid, remove dead copper, pour order 57): 2150,4378.64 2150,3843.64 2070,3843.64 2070,3778.64 2105,3778.64 2105,3578.64 1905,3578.64 1905,3493.64 1770,3493.64 1770,3578.64 1840,3578.64 1840,3718.64 1920,3718.64 1920,3798.64 1965,3798.64 1965,4378.64
NetD18_1 on Top Layer "Top Layer-No Net" (solid, remove dead copper, pour order 56): 2550,4378.64 2550,3843.64 2470,3843.64 2470,3778.64 2505,3778.64 2505,3578.64 2305,3578.64 2305,3493.64 2170,3493.64 2170,3578.64 2240,3578.64 2240,3718.64 2320,3718.64 2320,3798.64 2365,3798.64 2365,4378.64
GND on Top Layer "Top Layer-No Net" (solid, remove dead copper, pour order 81): 4265,3905 4265,3675 5460,3675 5460,3905
GND on Top Layer "Top Layer-No Net" (solid, remove dead copper, pour order 80): 4270,3475 4270,3245 5465,3245 5465,3475
NetF2_1 on Top Layer "Top Layer-No Net" (solid, remove dead copper, pour order 85): 4545,4100 4545,3905 5435,3905 5435,4100
NetF1_1 on Top Layer "Top Layer-No Net" (solid, remove dead copper, pour order 83): 4550,3675 4550,3475 5435,3475 5435,3675
GND on Top Layer "Top Layer-No Net" (solid, remove dead copper, pour order 79): 4255,4370 4255,4110 5210,4110 5210,4370
+12VCC1 on Top Layer "Top Layer-No Net" (solid, remove dead copper, pour order 89): 4550,3025 4550,3238.51 4266.49,3238.51 4260,3245 4260,3465 3830,3465 3830,3390 3740,3390 3740,3565 3710,3565 3710,3590 3480,3590 3480,3185 3935,3185 3935,3250 4005,3250 4005,3185 4095,3185 4095,3025
+12VCC2 on Top Layer "Top Layer-No Net" (solid, remove dead copper, pour order 86): 4545,3905 4545,4100 4255,4100 4245,4110 4245,4360 3860,4360 3860,4300 3760,4300 3760,4370 3480,4370 3480,4020 3760,4020 3760,4090 3950,4090 3950,4155 4020,4155 4020,3905
GND on Top Layer "Top Layer-No Net" (solid, remove dead copper, pour order 72): 885,1300 1180,1300 1180,1025 1095,1025 1095,950 1145,950 1145,875 1500,875 1500,950 1520,950 1520,1055 1360,1055 1360,1300 1740,1300 1740,30 1500,30 1500,380 1620,380 1620,455 1515,455 1515,575 1565,575 1565,530 1620,530 1620,635 1655,635 1655,735 1510,735 1510,660 1465,660 1465,735 940,735 940,485 995,485 995,385 1115,385 1115,30 885,30
GND on Top Layer "Top Layer-No Net" (solid, remove dead copper, pour order 93): 1115,3570 1115,3485 970,3485 970,3295 1305,3295 1305,3485 1255,3485 1255,3570
+12VCC1 on Bottom Layer "Mechanical 15-No Net" (solid, pour order 53): 5230,2661.79 5170,2661.79 5170,2710 4980,2710 4980,2635 4915,2635 4915,2785 5230,2785
SW on Bottom Layer "Mechanical 15-No Net" (solid, pour order 55): 4960,2600 5160,2600 5160,2520 4960,2520
NetF2_1 on Bottom Layer "Top Layer-No Net" (solid, remove dead copper, pour order 84): 4545,4100 4545,3905 5435,3905 5435,4100
NetF1_1 on Bottom Layer "Top Layer-No Net" (solid, remove dead copper, pour order 82): 4550,3675 4550,3475 5435,3475 5435,3675
GND on Bottom Layer "Top Layer-No Net" (solid, remove dead copper, pour order 98): 875,1300 875,0 1740,0 1740,1300
GND on Bottom Layer "Top Layer-No Net" (solid, remove dead copper, pour order 97): 1750,1300 1750,0 2615,0 2615,1300
GND on Bottom Layer "Top Layer-No Net" (solid, remove dead copper, pour order 96): 2625,1300 2625,0 3490,0 3490,1300
GND on Bottom Layer "Top Layer-No Net" (solid, remove dead copper, pour order 95): 3500,1300 3500,0 4365,0 4365,1300
GND on Bottom Layer "Top Layer-No Net" (solid, remove dead copper, pour order 94): 4375,1300 4375,0 5240,0 5240,1300
INPUT_GND on Groun Plane (split plane): 929.9,3515.1 260.1,3515.1 260.1,4379.9 929.9,4379.9
GND on Groun Plane (split plane): 5479.9,20.1 20.1,20.1 20.1,4379.9 249.9,4379.9 249.9,3510 250.29,3508.05 251.4,3506.4 253.05,3505.29 255,3504.9 935,3504.9 936.95,3505.29 938.6,3506.4 939.71,3508.05 940.1,3510 940.1,4379.9 5479.9,4379.9
+12VCC3 on Power Plane (split plane): 4537.77,4005 4537.42,3997.87 4536.37,3990.8 4534.64,3983.88 4532.23,3977.15 4529.18,3970.7 4525.51,3964.57 4521.25,3958.84 4516.46,3953.54 4511.16,3948.75 4505.43,3944.49 4499.3,3940.82 4492.85,3937.77 4486.12,3935.36 4479.2,3933.63 4472.13,3932.58 4465,3932.23 4457.87,3932.58 4450.8,3933.63 4443.88,3935.36 4437.15,3937.77 4430.7,3940.82 4424.57,3944.49 4418.84,3948.75 4413.54,3953.54 4408.75,3958.84 4404.49,3964.57 4400.82,3970.7 4397.77,3977.15 4395.36,3983.88 4393.63,3990.8 4392.58,3997.87 4392.23,4005 4392.47,4009.9 4537.53,4009.9
+12VCC3 on Power Plane (split plane): 4477.13,3647.42 4484.2,3646.37 4491.12,3644.64 4497.85,3642.23 4504.3,3639.18 4510.43,3635.51 4516.16,3631.25 4521.46,3626.46 4526.25,3621.16 4530.51,3615.43 4534.18,3609.3 4537.23,3602.85 4539.64,3596.12 4541.37,3589.2 4542.42,3582.13 4542.77,3575 4542.42,3567.87 4541.37,3560.8 4539.64,3553.88 4537.23,3547.15 4534.18,3540.7 4530.51,3534.57 4526.25,3528.84 4521.46,3523.54 4516.16,3518.75 4510.43,3514.49 4504.3,3510.82 4497.85,3507.77 4491.12,3505.36 4484.2,3503.63 4477.13,3502.58 4470,3502.23 4462.87,3502.58 4455.8,3503.63 4448.88,3505.36 4442.15,3507.77 4435.7,3510.82 4429.57,3514.49 4423.84,3518.75 4418.54,3523.54 4413.75,3528.84 4409.49,3534.57 4405.82,3540.7 4402.77,3547.15 4400.36,3553.88 4398.63,3560.8 4397.58,3567.87 4397.23,3575 4397.58,3582.13 4398.63,3589.2 4400.36,3596.12 4402.77,3602.85 4405.82,3609.3 4409.49,3615.43 4413.75,3621.16 4418.54,3626.46 4423.84,3631.25 4429.57,3635.51 4435.7,3639.18 4442.15,3642.23 4448.88,3644.64 4455.8,3646.37 4462.87,3647.42 4470,3647.77
+12VCC2 on Power Plane (split plane): 4472.13,4077.42 4479.2,4076.37 4486.12,4074.64 4492.85,4072.23 4499.3,4069.18 4505.43,4065.51 4511.16,4061.25 4516.46,4056.46 4521.25,4051.16 4525.51,4045.43 4529.18,4039.3 4532.23,4032.85 4534.64,4026.12 4536.15,4020.1 4393.85,4020.1 4395.36,4026.12 4397.77,4032.85 4400.82,4039.3 4404.49,4045.43 4408.75,4051.16 4413.54,4056.46 4418.84,4061.25 4424.57,4065.51 4430.7,4069.18 4437.15,4072.23 4443.88,4074.64 4450.8,4076.37 4457.87,4077.42 4465,4077.77
+12VCC3 on Power Plane (split plane): 4277.13,3647.42 4284.2,3646.37 4291.12,3644.64 4297.85,3642.23 4304.3,3639.18 4310.43,3635.51 4316.16,3631.25 4321.46,3626.46 4326.25,3621.16 4330.51,3615.43 4334.18,3609.3 4337.23,3602.85 4339.64,3596.12 4341.37,3589.2 4342.42,3582.13 4342.77,3575 4342.42,3567.87 4341.37,3560.8 4339.64,3553.88 4337.23,3547.15 4334.18,3540.7 4330.51,3534.57 4326.25,3528.84 4321.46,3523.54 4316.16,3518.75 4310.43,3514.49 4304.3,3510.82 4297.85,3507.77 4291.12,3505.36 4284.2,3503.63 4277.13,3502.58 4270,3502.23 4262.87,3502.58 4255.8,3503.63 4248.88,3505.36 4242.15,3507.77 4235.7,3510.82 4229.57,3514.49 4223.84,3518.75 4218.54,3523.54 4213.75,3528.84 4209.49,3534.57 4205.82,3540.7 4202.77,3547.15 4200.36,3553.88 4198.63,3560.8 4197.58,3567.87 4197.23,3575 4197.58,3582.13 4198.63,3589.2 4200.36,3596.12 4202.77,3602.85 4205.82,3609.3 4209.49,3615.43 4213.75,3621.16 4218.54,3626.46 4223.84,3631.25 4229.57,3635.51 4235.7,3639.18 4242.15,3642.23 4248.88,3644.64 4255.8,3646.37 4262.87,3647.42 4270,3647.77
+12VCC1 on Power Plane (split plane): 4477.13,3197.42 4484.2,3196.37 4491.12,3194.64 4497.85,3192.23 4504.3,3189.18 4510.43,3185.51 4516.16,3181.25 4521.46,3176.46 4526.25,3171.16 4530.51,3165.43 4534.18,3159.3 4537.23,3152.85 4539.64,3146.12 4541.37,3139.2 4542.42,3132.13 4542.77,3125 4542.42,3117.87 4541.37,3110.8 4539.64,3103.88 4537.23,3097.15 4534.18,3090.7 4530.51,3084.57 4526.25,3078.84 4521.46,3073.54 4516.16,3068.75 4510.43,3064.49 4504.3,3060.82 4497.85,3057.77 4491.12,3055.36 4484.2,3053.63 4477.13,3052.58 4470,3052.23 4462.87,3052.58 4455.8,3053.63 4448.88,3055.36 4442.15,3057.77 4435.7,3060.82 4429.57,3064.49 4423.84,3068.75 4418.54,3073.54 4413.75,3078.84 4409.49,3084.57 4405.82,3090.7 4402.77,3097.15 4400.36,3103.88 4398.63,3110.8 4397.58,3117.87 4397.23,3125 4397.58,3132.13 4398.63,3139.2 4400.36,3146.12 4402.77,3152.85 4405.82,3159.3 4409.49,3165.43 4413.75,3171.16 4418.54,3176.46 4423.84,3181.25 4429.57,3185.51 4435.7,3189.18 4442.15,3192.23 4448.88,3194.64 4455.8,3196.37 4462.87,3197.42 4470,3197.77
3.3VCC on Power Plane (split plane): 5219.9,2685.1 5185.1,2685.1 5185.1,2769.9 5219.9,2769.9
+12VCC1 on Power Plane (split plane): 4277.13,3197.42 4284.2,3196.37 4291.12,3194.64 4297.85,3192.23 4304.3,3189.18 4310.43,3185.51 4316.16,3181.25 4321.46,3176.46 4326.25,3171.16 4330.51,3165.43 4334.18,3159.3 4337.23,3152.85 4339.64,3146.12 4341.37,3139.2 4342.42,3132.13 4342.77,3125 4342.42,3117.87 4341.37,3110.8 4339.64,3103.88 4337.23,3097.15 4334.18,3090.7 4330.51,3084.57 4326.25,3078.84 4321.46,3073.54 4316.16,3068.75 4310.43,3064.49 4304.3,3060.82 4297.85,3057.77 4291.12,3055.36 4284.2,3053.63 4277.13,3052.58 4270,3052.23 4262.87,3052.58 4255.8,3053.63 4248.88,3055.36 4242.15,3057.77 4235.7,3060.82 4229.57,3064.49 4223.84,3068.75 4218.54,3073.54 4213.75,3078.84 4209.49,3084.57 4205.82,3090.7 4202.77,3097.15 4200.36,3103.88 4198.63,3110.8 4197.58,3117.87 4197.23,3125 4197.58,3132.13 4198.63,3139.2 4200.36,3146.12 4202.77,3152.85 4205.82,3159.3 4209.49,3165.43 4213.75,3171.16 4218.54,3176.46 4223.84,3181.25 4229.57,3185.51 4235.7,3189.18 4242.15,3192.23 4248.88,3194.64 4255.8,3196.37 4262.87,3197.42 4270,3197.77
+12VCC2 on Power Plane (split plane): 5479.9,4020.1 4546.45,4020.1 4546.29,4021.17 4544.31,4029.06 4541.57,4036.72 4538.1,4044.07 4533.91,4051.05 4529.07,4057.58 4523.61,4063.61 4517.58,4069.07 4511.05,4073.91 4504.07,4078.1 4496.72,4081.57 4489.06,4084.31 4481.17,4086.29 4473.12,4087.48 4465,4087.88 4456.88,4087.48 4448.83,4086.29 4440.94,4084.31 4433.28,4081.57 4425.93,4078.1 4418.95,4073.91 4412.42,4069.07 4406.39,4063.61 4400.93,4057.58 4396.09,4051.05 4391.9,4044.07 4388.43,4036.72 4385.69,4029.06 4383.71,4021.17 4383.55,4020.1 4346.45,4020.1 4346.29,4021.17 4344.31,4029.06 4341.57,4036.72 4338.1,4044.07 4333.91,4051.05 4329.07,4057.58 4323.61,4063.61 4317.58,4069.07 4311.05,4073.91 4304.07,4078.1 4296.72,4081.57 4289.06,4084.31 4281.17,4086.29 4273.12,4087.48 4265,4087.88 4256.88,4087.48 4248.83,4086.29 4240.94,4084.31 4233.28,4081.57 4225.93,4078.1 4218.95,4073.91 4212.42,4069.07 4206.39,4063.61 4200.93,4057.58 4196.09,4051.05 4191.9,4044.07 4188.43,4036.72 4185.69,4029.06 4183.71,4021.17 4183.55,4020.1 1415.1,4020.1 1415.1,4379.9 5479.9,4379.9
+12VCC3 on Power Plane (split plane): 4337.77,4005 4337.42,3997.87 4336.37,3990.8 4334.64,3983.88 4332.23,3977.15 4329.18,3970.7 4325.51,3964.57 4321.25,3958.84 4316.46,3953.54 4311.16,3948.75 4305.43,3944.49 4299.3,3940.82 4292.85,3937.77 4286.12,3935.36 4279.2,3933.63 4272.13,3932.58 4265,3932.23 4257.87,3932.58 4250.8,3933.63 4243.88,3935.36 4237.15,3937.77 4230.7,3940.82 4224.57,3944.49 4218.84,3948.75 4213.54,3953.54 4208.75,3958.84 4204.49,3964.57 4200.82,3970.7 4197.77,3977.15 4195.36,3983.88 4193.63,3990.8 4192.58,3997.87 4192.23,4005 4192.47,4009.9 4337.53,4009.9
+12VCC2 on Power Plane (split plane): 4272.13,4077.42 4279.2,4076.37 4286.12,4074.64 4292.85,4072.23 4299.3,4069.18 4305.43,4065.51 4311.16,4061.25 4316.46,4056.46 4321.25,4051.16 4325.51,4045.43 4329.18,4039.3 4332.23,4032.85 4334.64,4026.12 4336.15,4020.1 4193.85,4020.1 4195.36,4026.12 4197.77,4032.85 4200.82,4039.3 4204.49,4045.43 4208.75,4051.16 4213.54,4056.46 4218.84,4061.25 4224.57,4065.51 4230.7,4069.18 4237.15,4072.23 4243.88,4074.64 4250.8,4076.37 4257.87,4077.42 4265,4077.77
+12VCC3 on Power Plane (split plane): 213 vertices, not listed, extent 975.1,3500.1 5479.9,4379.9
+12VCC1 on Power Plane (split plane): 3884.9,3495 3885.29,3493.05 3886.4,3491.4 3888.05,3490.29 3890,3489.9 5479.9,3489.9 5479.9,20.1 965.1,20.1 965.1,544.9 5060,544.9 5061.95,545.29 5063.6,546.4 5064.71,548.05 5065.1,550 5065.1,1755 5064.71,1756.95 5063.6,1758.6 5000.1,1822.11 5000.1,2037.5 5000.1,2845 4999.71,2846.95 4998.6,2848.6 4996.95,2849.71 4995,2850.1 4212.11,2850.1 4053.6,3008.6 4051.95,3009.71 4050,3010.1 3630.1,3010.1 3630.1,3495 3630.1,3594.9 3884.9,3594.9
3.3VCC on Power Plane (split plane): 964.9,3695 965.29,3693.05 966.4,3691.4 968.05,3690.29 970,3689.9 3469.9,3689.9 3469.9,3605 3470.29,3603.05 3471.4,3601.4 3473.05,3600.29 3475,3599.9 3612.89,3599.9 3619.9,3592.89 3619.9,3495 3619.9,3005 3620.29,3003.05 3621.4,3001.4 3623.05,3000.29 3625,2999.9 4047.89,2999.9 4206.4,2841.4 4208.05,2840.29 4210,2839.9 4989.9,2839.9 4989.9,2037.5 4989.9,1820 4990.29,1818.05 4991.4,1816.4 5054.9,1752.89 5054.9,555.1 960,555.1 958.05,554.71 956.4,553.6 955.29,551.95 954.9,550 954.9,20.1 20.1,20.1 20.1,4379.9 964.9,4379.9

## Keep-outs
Keep-Out Layer:
  lines w10: 25,25 5475,25 5475,4375 25,4375 25,25

## Other copper
Groun Plane (plane layer: these items are gaps in the copper):
  lines w10: 255,4400 255,3510 935,3510 935,4405
Power Plane (plane layer: these items are gaps in the copper):
  circle w10: c4470,3125 r77.78
  circle w10: c4270,3125 r77.78
  circle w10: c4465,4005 r77.78
  circle w10: c4265,4005 r77.78
  circle w10: c4270,3575 r77.78
  circle w10: c4470,3575 r77.78
  lines w10: 960,0 960,550 5060,550 5060,1755 4995,1820 4995,2037.5 4995,2845 4210,2845 4050,3005 3625,3005 3625,3495 3625,3600 3890,3600 3890,3495 5505,3495 ; 970,4400 970,3695 3475,3695 3475,3605 3615,3605 3625,3595 ; 1410,4400 1410,4015 3665,4015 ; 3660,4015 5500,4015 ; 5180,2680 5180,2775 5225,2775 5225,2680 5180,2680

## Silkscreen, mask and mechanical layers (free items; w line width, h text height)
Top Overlay:
  lines w6: 975,4048.64 975,3943.64 1400,3943.64 ; 1400,4043.64 1400,3943.64 ; 1800,4048.64 1800,3943.64 ; 2200,4048.64 2200,3943.64 ; 2625,4048.64 2625,3943.64 2200,3943.64 ; 4970,2859.5 4970,3284.5 ; 5120,3284.5 4970,3284.5 ; 5120,3684.5 4970,3684.5 ; 5120,4109.5 4970,4109.5 4970,3684.5 ; 1400,3943.64 1800,3943.64 ; 1800,3943.64 2200,3943.64 ; 4970,3284.5 4970,3684.5
  lines w10: 3247.91,892.01 3303.66,892.01 3335.12,860.55 ; 40,40 40,220 220,220 220,40 195,40 40,40 ; 40,4180 195,4180 220,4180 220,4360 40,4360 40,4180 ; 5275,45 5455,45 5455,225 5275,225 5275,45 ; 5280,4180 5280,4360 5460,4360 5460,4180 5280,4180
  text "MOSFETS" at 4145,4120 h120
  text "FAN-0" at 2660,4018.64 h120
  text "FAN-1" at 2995,4018.64 h120
  text "HEAT-1" at 1855,3968.64 h100
  text "HEAT-2" at 2270,3968.64 h100
  text "HEATBED" at 1010,3963.64 h100
  text "HEAT-0" at 1455,3963.64 h100
  text "PWR IN 3" at 5040,3739.5 h90 r90
  text "12V - 24V" at 5105,3739.5 h90 r90
  text "HEATBED" at 4150,3680 h120
  text "PWR IN 2" at 5040,3329.5 h90 r90
  text "12V - 24V" at 5105,3329.5 h90 r90
  text "MOTORS/LOGIC" at 4150,3235 h120
  text "PWR IN 1" at 5040,2904.5 h90 r90
  text "12V - 24V" at 5105,2904.5 h90 r90
  text "Smart Port" at 2107,2747 h160
  text "Designed By Adam Vadala-Roth" at 6250,2530 h120
  text "5V 3A" at 5475,2515 h150 r90
  text "Developed By Johnny Russel and Adam Vadala-Roth" at 6250,2435 h120
  text "E2 & E3" at 365,2230 h160 r270
  text "AVR" at 6305,2075 h100
  text "Tigershark 3D" at 2300,2000 h190
  text "3.3V 2A" at 5480,1965 h150 r90
  text "Prototype ZERO" at 2260,1850 h200
  text "MAX / MIN" at 90,1530 h120
  text "S" at 2170,1495 h175
  text "Z" at 2565,1495 h75
  text "G" at 2955,1495 h325
  text "X" at 720,1250 h300
  text "Y" at 720,825 h300
  text "Z" at 725,405 h300
  text "STEPPER DRIVERS" at 5355,260 h120 r90
  text "NEMA23/NEAM17 2A" at 5450,260 h120 r90
  text "ENDSTOPS" at 235,180 h120
  text "X" at 895,20 h300
  text "Y" at 1770,20 h300
  text "Z" at 2645,20 h300
  text "E" at 3515,20 h300
  text "0" at 4210,20 h300
  text "E" at 4405,20 h300
  text "1" at 5085,20 h300
Bottom Overlay:
  text "Tigershark 3D" at 7555,1425 h250
  text "G" at 7340,1070 h325
  text "S" at 7085,1055 h175
  text "Z" at 7480,1055 h75
  text "Based On the Work of Ultimachine," at 7580,925 h140
  text "Arduino, RepRap, and Synthetos.com" at 7580,810 h140
  text "Codeveloped By Adam Vadala-Roth" at 7580,695 h140
  text "& Johnny Russel" at 7580,580 h140
  text "PCB Designed By Adam Vadala-Roth" at 7580,465 h140
Mechanical 15:
  lines w10: 0,0 0,4400 5500,4400 5500,760 5500,400 5500,0 0,0

## Text inside footprints (layer, text, board x,y; h text height)
FAN-1: Mechanical 16 "1" at 3262.5,4285.08 h62 r180
FAN-2: Mechanical 16 "1" at 2927.5,4285.08 h62 r180
FETS: Top Overlay "4" at 1600,4112.58 h77.5; Top Overlay "3" at 1400,4112.58 h77.5; Top Overlay "2" at 1200,4112.58 h77.5; Top Overlay "1" at 1015,4112.58 h77.5; Top Overlay "5" at 1800,4112.58 h77.5; Top Overlay "6" at 2000,4112.58 h77.5; Top Overlay "7" at 2200,4112.58 h77.5; Top Overlay "8" at 2400,4112.58 h77.5
MAX1_EndstopChannel1: Mechanical 16 "1" at 142.5,1482.5 h62 r270
MAX1_EndstopChannel2: Mechanical 16 "1" at 142.5,642.5 h62 r270
MAX1_EndstopChannel3: Mechanical 16 "1" at 142.5,1062.5 h62 r270
MIN1_EndstopChannel1: Mechanical 16 "1" at 507.5,1157.5 h62 r90
MIN1_EndstopChannel2: Mechanical 16 "1" at 507.5,317.5 h62 r90
MIN1_EndstopChannel3: Mechanical 16 "1" at 507.5,737.5 h62 r90
P2_ThermistorChannel1: Mechanical 16 "1" at 4582.5,2257.5 h62 r90
P2_ThermistorChannel2: Mechanical 16 "1" at 4582.5,2642.5 h62 r90
"Power Input1": Top Overlay "6" at 5185,3084.5 h77.5 r270; Top Overlay "5" at 5185,3284.5 h77.5 r270; Top Overlay "1" at 5185,4069.5 h77.5 r270; Top Overlay "2" at 5185,3884.5 h77.5 r270; Top Overlay "3" at 5185,3684.5 h77.5 r270; Top Overlay "4" at 5185,3484.5 h77.5 r270
T2_ThermocoupleChannel1: Mechanical 16 "1" at 4027.5,2257.5 h62 r90
T2_ThermocoupleChannel2: Mechanical 16 "1" at 4027.5,2642.5 h62 r90
U3: Top Overlay "R" at 1438.56,2107.73 h37.2 r270; Top Overlay "TQFP 144" at 1383.05,2352.36 h49.6 r270